# Altium PCB PCB1.PcbDoc
Units mil, origin at the board's own origin, x right, y up, seen from the top; angles counter-clockwise.
Board outline 984.25 x 1968.5 mil, 2 copper layers (Top Layer, Bottom Layer); 41 components, 26 nets, 123 pads, 58 vias.
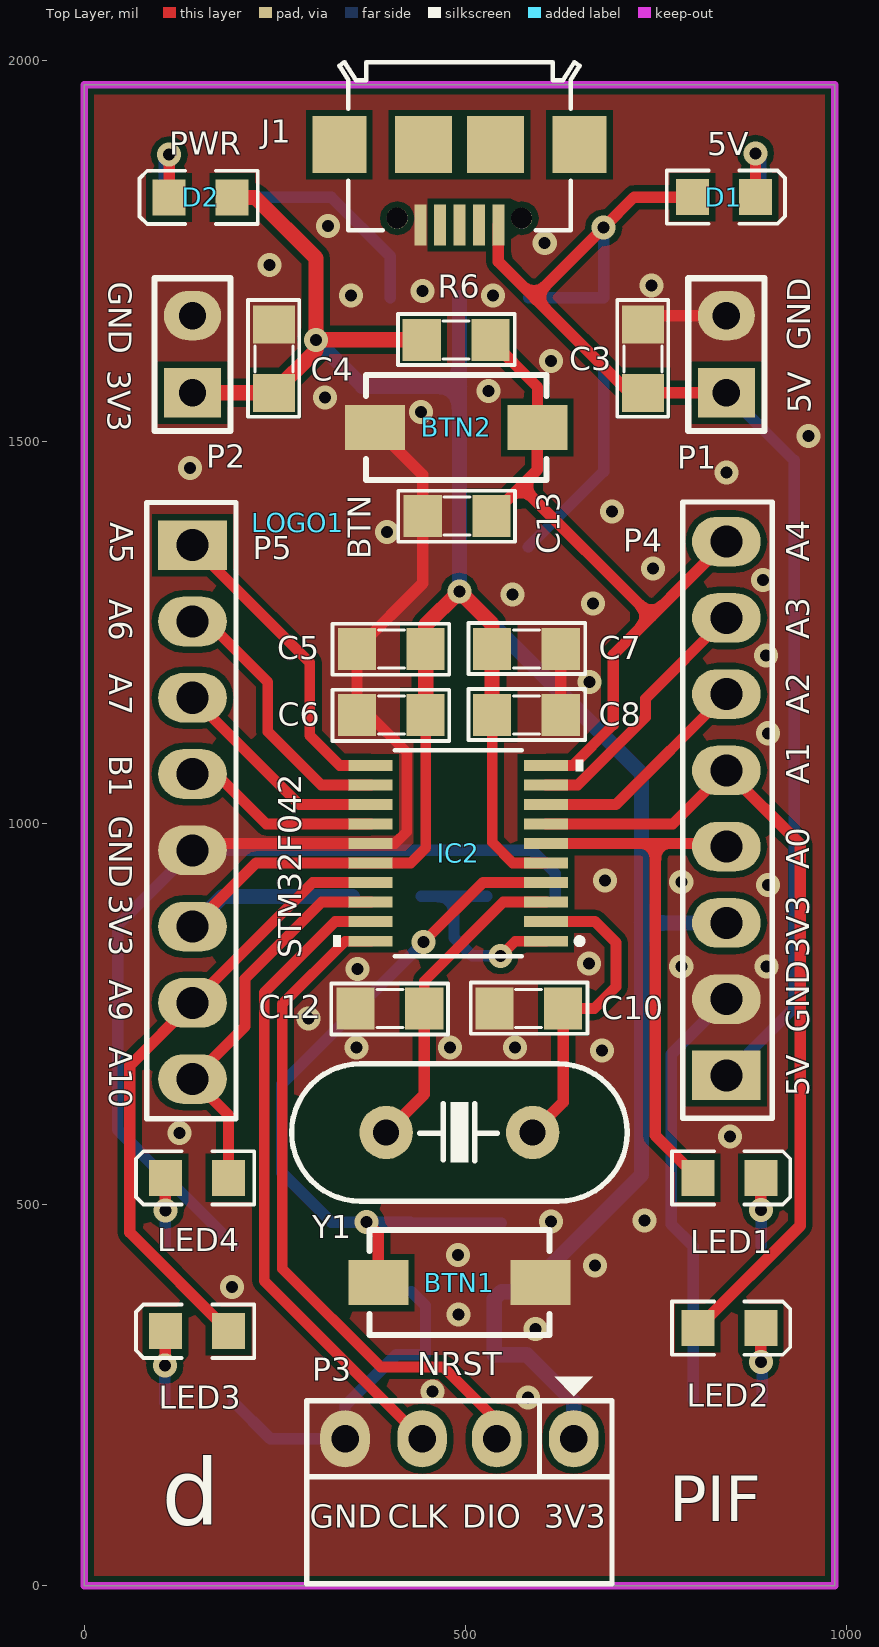
[diagram p0: Top Layer view]
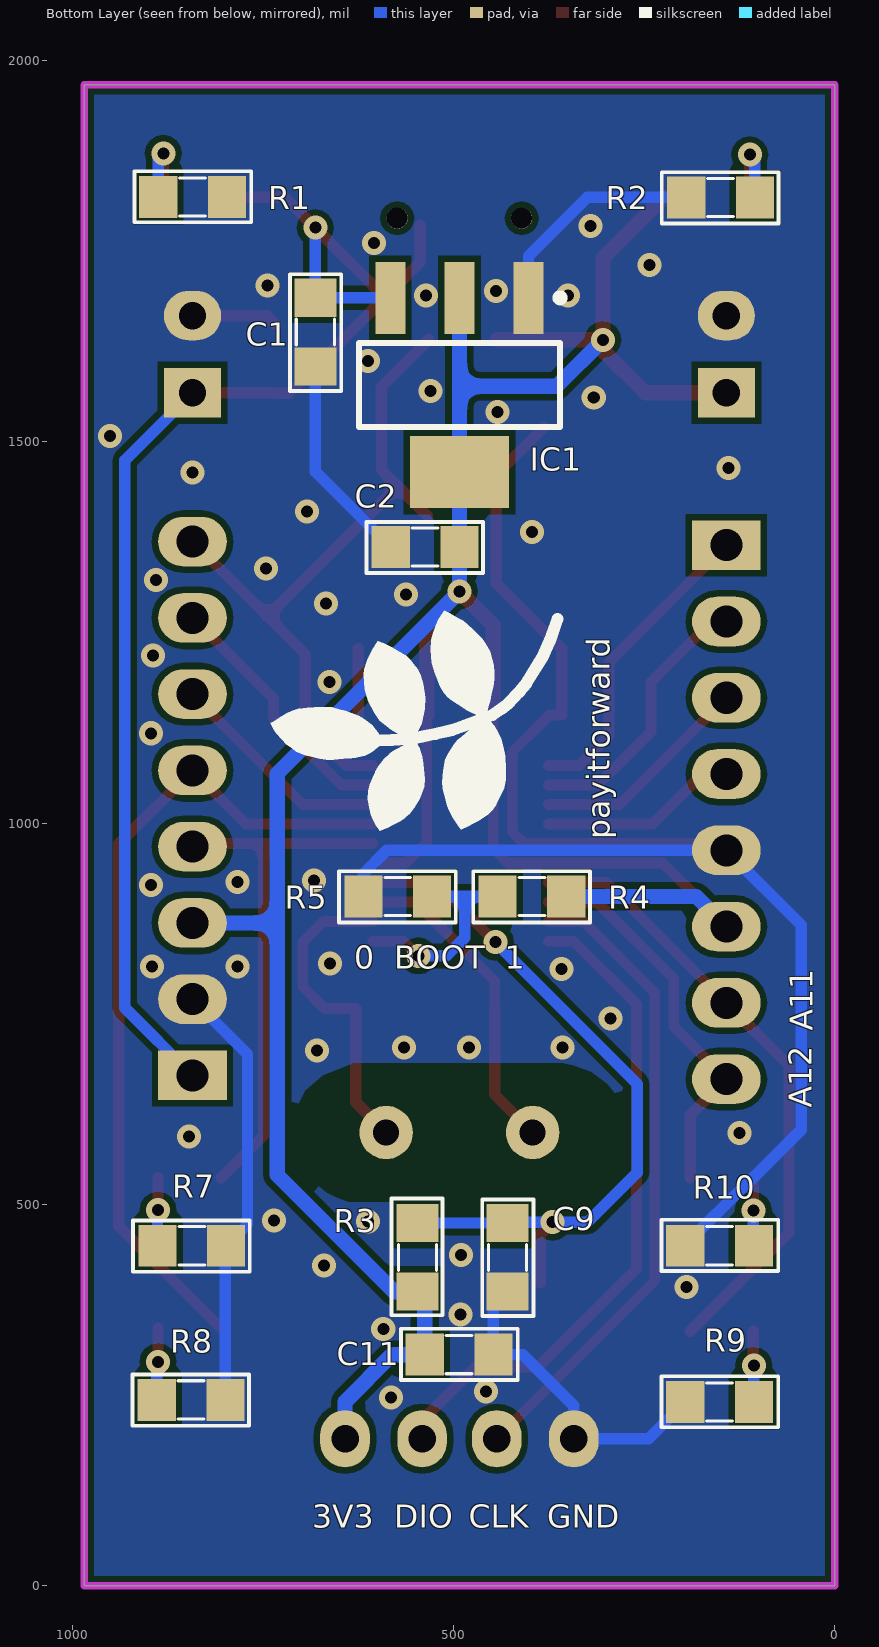
[diagram p1: Bottom Layer view, seen from below]
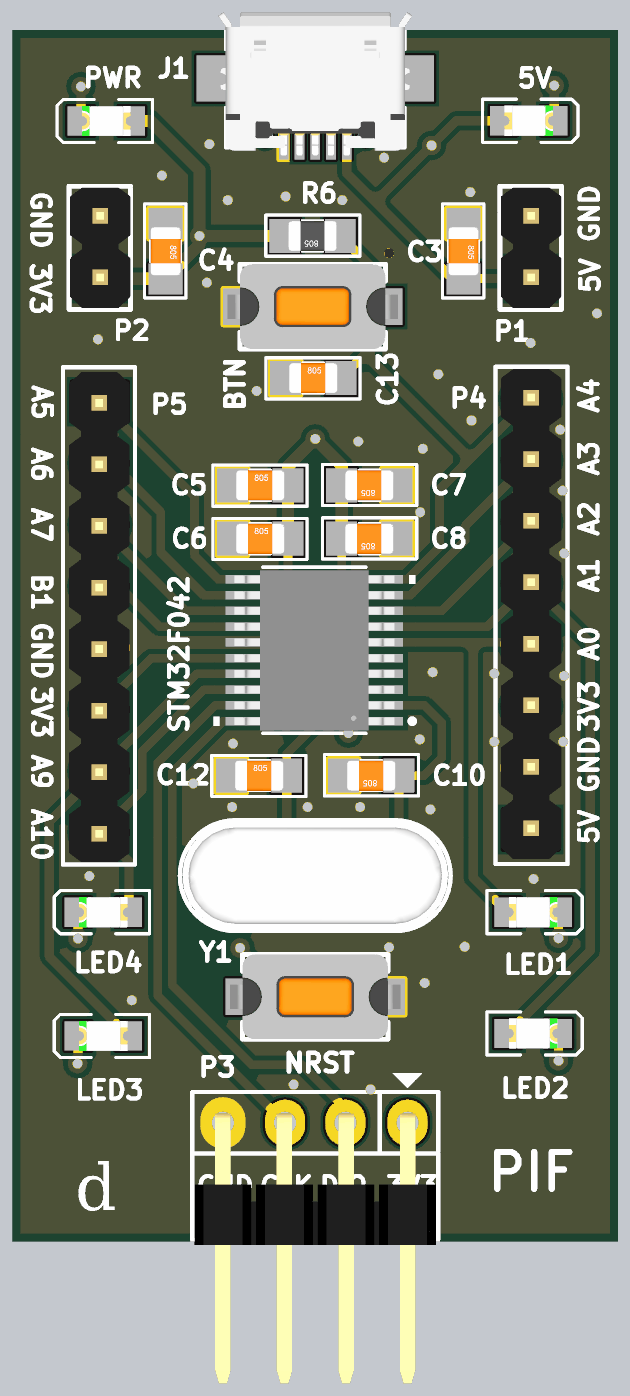
[diagram p2: 3D render of the assembled board from above, using the file's embedded part models]
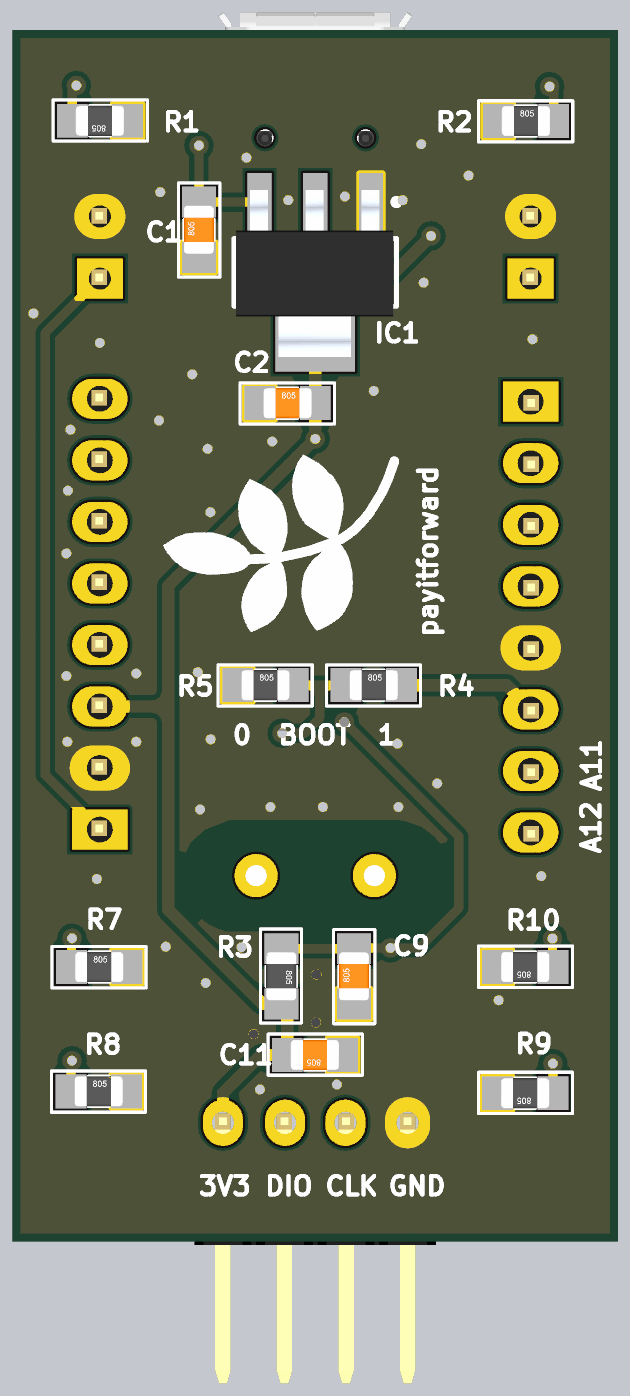
[diagram p3: 3D render of the assembled board from below, using the file's embedded part models]

## Layer stack, top to bottom
Top Solder: solder mask 0.4, Solder Resist, Dk 3.5
Top Layer: signal copper 1.4
Dielectric 1: dielectric 12.6, FR-4, Dk 4.8
Bottom Layer: signal copper 1.4
Bottom Solder: solder mask 0.4, Solder Resist, Dk 3.5

## Board outline
0,0 984.25,0 984.25,1968.5 0,1968.5

## Design rules (kind name [scope] priority, off if disabled: settings)
Clearance [All] p1: gap=8 ignorepadtopadclearanceinfootprint=FALSE
PlaneConnect [All] p1: planeconnectstyle=Direct reliefexpansion=20 reliefentries=4 reliefconductorwidth=10 reliefairgap=10
PolygonConnect [All] p1: connectstyle=Direct reliefconductorwidth=10 reliefentries=4 polygonreliefangle="90 Angle" airgapwidth=10
RoutingVias [All] p1: holewidth=15.75 width=31.5 viastyle="Through Hole" minholewidth=15.75 minwidth=31.5 maxholewidth=15.75 maxwidth=31.5
SolderMaskExpansion [All] p1: expansion=4
UnRoutedNet [All] p1: checkbadconnections=TRUE
UnpouredPolygon [All] p1: allowunpoured=TRUE allowshelved=TRUE
Width [All] p1: maxlimit=40 minlimit=10 preferedwidth=15 minimp=50.000000 maximp=50.000000 favimp=50.000000
27 further rules are at their usual default settings.

## Components (designator, comment, footprint, x,y, rotation, side; value= is the part's Value field where it differs from the comment)
BTN1 "Button" 434123050836 492.13,397.64 r180 top
BTN2 "Button" 434123050836 488,1519 r0 top
C1 "Cap Non-Pol SMD" CAP-SM-0805 681.1,1598.98 r90 bottom value=100nF
C2 "Cap Non-Pol SMD" CAP-SM-0805 582.13,1362.2 r180 bottom value=100nF
C3 "Cap Non-Pol SMD" CAP-SM-0805 733,1654 r270 top value=100nF
C4 "Cap Non-Pol SMD" CAP-SM-0805 249,1654 r270 top value=100nF
C5 "Cap Non-Pol SMD" CAP-SM-0805 357.83,1228.61 r0 top value=10uF
C6 "Cap Non-Pol SMD" CAP-SM-0805 357.83,1142 r0 top value=100nF
C7 "Cap Non-Pol SMD" CAP-SM-0805 625,1228.61 r180 top value=10uF
C8 "Cap Non-Pol SMD" CAP-SM-0805 625,1142 r180 top value=100nF
C9 "Cap Non-Pol SMD" CAP-SM-0805 429.13,385.83 r90 bottom value=100nF
C10 "Cap Non-Pol SMD" CAP-SM-0805 628,757 r180 top value=22pF
C11 "Cap Non-Pol SMD" CAP-SM-0805 447.63,303.15 r0 bottom value=100nF
C12 "Cap Non-Pol SMD" CAP-SM-0805 356,757 r0 top value=22pF
C13 "Cap Non-Pol SMD" CAP-SM-0805 444,1403 r0 top value=100nF
D1 "LED" LED_0805_Blue 839,1821 r0 top
D2 "LED" LED_0805_Blue 152.74,1820.59 r180 top
IC1 "AMS1117" SOT223 492.13,1574.8 r270 bottom value=LM317
IC2 "STM32F042F6P6" TSSOP20 490.69,960.63 r180 top
J1 "Micro USB 2.0 Type B Receptacle" 629105136821 492.13,1889.76 r180 top locked
LED1 "LED" LED_0805_Blue 846,535 r0 top
LED2 "LED" LED_0805_Blue 846,338 r0 top
LED3 "LED" LED_0805_Blue 148,334 r180 top
LED4 "LED" LED_0805_Blue 148,535 r180 top
LOGO1 "LOGO PIF" "PIF LOGO BOTTOM OVERLAY" 280,1394 r270 top
P1 "Header 2" JP2 842.13,1564.57 r90 top
P2 "Header 2" JP2 142.13,1564.57 r90 top
P3 "Header 4H" JP4H 642.13,192.91 r180 top locked
P4 "Header 8" JP8 842.13,669.29 r90 top
P5 "Header 8" JP8 142.13,1364.57 r270 top
R1 "Resistor 1/4W" RES-SM-0805 797,1821 r0 bottom value=470
R2 "Resistor 1/4W" RES-SM-0805 194.74,1820.59 r180 bottom value=470
R3 "Resistor 1/4W" RES-SM-0805 547.24,475.83 r270 bottom value=10K
R4 "Resistor 1/4W" RES-SM-0805 442,904 r180 bottom value=0
R5 "Resistor 1/4W" RES-SM-0805 618,904 r180 bottom value=0
R6 "Resistor 1/4W" RES-SM-0805 532.69,1633.86 r180 top value=10K
R7 "Resistor 1/4W" RES-SM-0805 888,446 r180 bottom value=470
R8 "Resistor 1/4W" RES-SM-0805 889,244 r180 bottom value=470
R9 "Resistor 1/4W" RES-SM-0805 106,241 r0 bottom value=470
R10 "Resistor 1/4W" RES-SM-0805 106,446 r0 bottom value=470
Y1 "8MHz" XTAL 492.13,594.49 r0 top locked

## Footprints (in the part's own frame and the unit in brackets; to place one, negate y for a bottom-side part, rotate by r counter-clockwise, add the part's x,y. Pads: shape width x height; smd on the part's side, far side on the other; paste and mask are expansions set on the pad)
434123050836 [mm] "SMD Tact Switch, body 6x3.5mm"
  rect 2x1.5 smd: 1(-2.7,0) 2(2.7,0)
  silkscreen extent -3,-1.75 3,1.75, body extent -3.65,-1.75 3.65,1.75, height 5
629105136821 [mm] "Micro USB 2.0 SMT Type B Horizontal 5 Contacts"
  rect 0.4x1.35 smd: 1(-1.3,2.675) 2(-0.65,2.675) 3(0,2.675) 4(0.65,2.675) 5(1.3,2.675)
  round 0.7 hole 0.7 unplated: MH1(-2.075,2.45) MH2(2.075,2.45)
  rect 1.8x1.9 smd: Shell(-4,0) Shell(4,0)
  rect 1.9x1.9 smd: Shell(-1.2,0) Shell(1.2,0)
  silkscreen extent -4,-2.75 4,2.85, body extent -4,-2.73 4,3.17, height 2.69
CAP-SM-0805 [mil]
  rect 50x55 smd: 1(0,0) 2(90,0)
  silkscreen extent -32,-34 121,33, body extent 6,-25 84,25, height 31
JP2 [mil]
  rect 65x75 hole 36: 1(0,0)
  oval 65x75 hole 36: 2(101,0)
  silkscreen extent -50,-50 150,50, body extent -48,-50 148,48, height 323
JP4H [mil]
  oval 65x75 hole 36: 1(0,0) 2(101,0) 3(199,0) 4(300,0)
  silkscreen extent -50,-81 350,190, body extent -46,-15 346,424, height 99
JP8 [mil] "JP8"
  rect 65x90 hole 42: 1(0,0)
  oval 65x90 hole 42: 2(100,0) 3(200,0) 4(300,0) 5(400,0) 6(500,0) 7(600,0) 8(700,0)
  silkscreen extent -56,-60 752,57, body extent -48,-50 748,48, height 323
LED_0805_Blue [mm] "Chip LED, 2-Leads, Body 2.0x1.3mm, IPC Medium Density"
  rect 1.1x1.2 smd: 1(-1.05,0) 2(1.05,0)
  silkscreen extent -1.91,-0.89 2.03,0.89, body extent -1,-0.63 1,0.62, height 0.68
"PIF LOGO BOTTOM OVERLAY" [mil]
RES-SM-0805 [mil]
  rect 50x55 smd: 1(0,0) 2(90,0)
  silkscreen extent -32,-34 121,33, body extent 6,-25 84,25, height 31
SOT223 [mm] "SOT223, 4-Leads, Body 6.5x3.5mm, Pitch 2.3mm, Lead Span 7mm, IPC Medium Density"
  rect 2.4x1 smd: 1(-2.9,2.3) 2(-2.9,0) 3(-2.9,-2.3)
  rect 2.4x3.3 smd: 4(2.9,0)
  silkscreen extent -3.02,-3.35 1.4,3.47, body extent -3.39,-3.27 3.5,3.23, height 1.72
TSSOP20 [mil]
  rect 58x14 smd paste+0 mask+0: 1(-115,115.16) 2(-115,89.57) 3(-115,63.98) 4(-115,38.39) 5(-115,12.8) 6(-115,-12.8) 7(-115,-38.39) 8(-115,-63.98) 9(-115,-89.57) 10(-115,-115.16) 11(115,-115.16) 12(115,-89.57) 13(115,-63.98) 14(115,-38.39) 15(115,-12.8) 16(115,12.8) 17(115,38.39) 18(115,63.98) 19(115,89.57) 20(115,115.16)
  silkscreen extent -164,-135 164,135, body extent -130,-130 130,130, height 47
XTAL [mil] "Footpin for Crystal 2 pin"
  round 70 hole 34: 1(-96.06,0) 2(96.06,0)
  silkscreen extent -220,-90 220,90, body extent -216,-88 216,88, height 142

## Part data
C1 C2 C3 C4 C5 C6 C7 C8 C9 C10 C11 C12 C13: "Capacitor"
IC1: "Available in 1.8V, 2.5V, 2.85V, 3.3V, 5V, and  Adjustable Versions"
IC2: "ARM® Cortex®-M0 STM32F0 Microcontroller IC 32-Bit 48MHz 32KB _32K x 8_ FLASH 20-TSSOP", Package="TSSOP-20 STMicroelectronics", Availability=Unavailable, MF=STMicroelectronics, MP=STM32F042F6P6, Price=None, SnapEDA_Link=https://www.snapeda.com/parts/STM32F042F6P6/STMicroelectronics/view-part/109253/?ref=snap
J1: library part 629105136821, "Micro USB 2.0 Type B, Receptacle, Horizontal, SMT", Manufacturer="Wurth Elektronik", Operating Temperature="-40 to +105degC", Rated Current=1A, Working Voltage=30VAC, Application="Micro USB 2.0", ComponentLink1Description=Manufacturer, ComponentLink1URL=http://www.we-online.de, ComponentLink2Description=Datasheet, ComponentLink2URL=https://katalog.we-online.com/em/datasheet/629105136821.pdf, Gender=Receptacle, Interface Type="Type B", Manufacturer Part Number=629105136821, Mounting Technology=SMT, Packaging="Tape and Reel", Pin Number=5, Published Date="August 2020", Type=Horizontal
P1 P2: "Header, 2-Pin", LatestRevisionDate=17-Jul-2002, LatestRevisionNote="Re-released for DXP Platform.", Publisher="Altium Limited"
P3: "Header, 4-Pin, Right Angle", LatestRevisionDate=17-Jul-2002, LatestRevisionNote="Re-released for DXP Platform.", Publisher="Altium Limited"
P4 P5: "Header, 8-Pin", LatestRevisionDate=17-Jul-2002, LatestRevisionNote="Re-released for DXP Platform.", Publisher="Altium Limited"
R1 R2 R3 R4 R5 R6 R7 R8 R9 R10: library part RES
Y1: library part XTAL, "Crystal For all Crystal 2pin"

## Via types
v1: diameter 31.5, hole 15.75, Top Layer to Bottom Layer, tented both sides, 58 vias

## Nets (pads, with @x,y where several pads share a name; then routed paths per layer and width w, separated by ;. In a path a pad name is that pad's centre, name@x,y a point inside that pad or via, vN(x,y) a via of type N, cw(c..) or ccw(c..) an arc to the next point about the centre after c; other vN are vias at no path point)
3.3V: C2.2 C4.2 C5.2 C6.2 C7.2 C8.2 C11.2 D2.1 IC1.2 IC1.4 IC2.5 IC2.16 P2.1 P3.1 P4.3 P5.6 R3.2 R4.2 R6.2 | length 4031.4
  Top Layer w14: P5.6 225.39,947.83 IC2.16 428.19,947.83 447.83,967.48 C6.2 ; C8.2 535,975 562.17,947.83 IC2.5
  Top Layer w20: P2.1 248.43,1564.57 304,1620.13 v1(304,1633.86) ; D2.1 224.41,1820.59 304,1741 v1(304,1633.86) ; R6.2 v1(304,1633.86) ; C6.2 C5.2 447.83,1259.83 v1(492.13,1304.13) 535,1261.25 C7.2 C8.2
  Bottom Layer w20: P5.6 181.56,904 R4.2 ; v1(304,1633.86) 364.86,1573 492.13,1573 ; IC1.2 492.13,1573 ; P3.1 642.13,241.29 580.26,303.15 C11.2 537.63,376.21 R3.2 577.83,385.83 731,539 731,869.29 ; P4.3 731,869.29 ; 492.13,1573 IC1.4 C2.2 v1(492.13,1304.13) 731,1065.25 731,869.29
5V: C1.2 C3.2 D1.1 IC1.3 J1.1 P1.1 P4.1 | length 1840.1
  Top Layer w15: J1.1 543.31,1736.22 589.87,1689.66 ; D1.1 721.2,1821 v1(681.1,1780.9) 589.87,1689.66 ; P1.1 733.57,1564.57 C3.2 715.53,1564 589.87,1689.66
  Bottom Layer w15: IC1.3 C1.2 v1(681.1,1780.9) ; P4.1 931,758.17 931,1475.69 P1.1
BOOT0: IC2.1 R4.1 R5.2 | length 278.7
  Top Layer w14: v1(546,826) 565.47,845.47 IC2.1
  Bottom Layer w15: R4.1 485,904 ; R5.2 485,904 ; v1(546,826) 509,826 485,850 485,904
GND: BTN1.1 BTN2.1 C1.1 C2.1 C3.1 C4.1 C5.1 C6.1 C7.1 C8.1 C9.1 C10.2 C11.1 C12.1 C13.1 IC1.1 IC2.15 J1.5 P1.2 P2.2 P3.4 P4.2 P5.5 R1.1 R2.1 R5.1 R7.2 R8.2 R9.2 R10.2 | length 3831.9
  Top Layer w14: P5.5 150.98,973.43 IC2.15 407.43,973.43 423,989 423,1093 374,1142 C6.1
  Top Layer w15: C6.1 C5.1 444,1314.78 C13.1 444,1456.7 BTN2.1 ; C8.1 C7.1 ; C3.1 744.57,1665.57 P1.2
  Bottom Layer w15: R2.1 324.41,1820.59 401.57,1743.43 IC1.1 ; R9.2 244.09,192.91 P3.4 342.13,236.13 409.15,303.15 C11.1 447.63,367.33 C9.1 ; R10.2 196,447.19 113.19,530 112,530 44,598 44,866.44 P5.5 587.43,964.57 618,934 R5.1 ; C2.1 681.1,1461.18 C1.1 ; R8.2 799,445 R7.2 770,474 770,697.17 P4.2
  other v1: 581.98,247 457,255 592,337 491,356 194.08,392 670,420 490.28,434 612,478 735,479 847,589 125,593.81 679.16,702 357,706 479.67,706 565,706 294,744.14 358.5,808.88 783,812 895,812 662,816 896.6,919 783,923 682.98,925 896.6,1118 662.55,1185 894,1220 667,1288 562,1299.94 890,1319 746,1334 397,1382 692,1409 842.13,1460 139,1466 950,1508 442,1539 316,1558 530,1566.53 612.22,1606 350,1692 536,1692 444,1698 744,1705 243,1732 604,1761 320,1783
NetD1_2: D1.2 R1.2 | length 117.4
  Top Layer w15: D1.2 v1(880.34,1878.34)
  Bottom Layer w15: v1(880.34,1878.34) 887,1871.68 R1.2
NetD2_2: D2.2 R2.2 | length 114.8
  Top Layer w15: D2.2 v1(111.4,1876.6)
  Bottom Layer w15: R2.2 104.74,1869.94 v1(111.4,1876.6)
NetLED1_2: LED1.2 R7.1 | length 89.3
  Top Layer w15: v1(887.34,492.66) LED1.2
  Bottom Layer w15: v1(887.34,492.66) 888,492 R7.1
NetLED2_2: LED2.2 R8.1 | length 94.7
  Top Layer w15: v1(887.34,293.66) LED2.2
  Bottom Layer w15: v1(887.34,293.66) 889,292 R8.1
NetLED3_2: LED3.2 R9.1 | length 93.3
  Top Layer w14: v1(106,289) v1@106.66,289.66
  Top Layer w15: v1@106.66,289.66 LED3.2
  Bottom Layer w15: R9.1 v1(106,289)
NetLED4_2: LED4.2 R10.1 | length 89.3
  Top Layer w15: v1(106.66,492.34) LED4.2
  Bottom Layer w15: R10.1 106.66,446.66 v1(106.66,492.34)
NRST: BTN1.2 C9.2 IC2.4 R3.1 | length 973.8
  Top Layer w14: v1(444.88,844) 523.13,922.24 IC2.4
  Top Layer w15: v1(370,477) 385.83,461.17 BTN1.2
  Bottom Layer w15: v1(444.88,844) 259,658.12 259,542 324,477 v1(370,477) 427.96,477 C9.2 R3.1
OSC_IN: C10.1 IC2.2 Y1.2 | length 421.5
  Top Layer w14: IC2.2 669.94,871.06 697.44,843.56 697.44,785.44 669,757 C10.1
  Top Layer w15: Y1.2 628,634.3 C10.1
OSC_OUT: C12.2 IC2.3 Y1.1 | length 421.8
  Top Layer w14: C12.2 446,793 549.65,896.65 IC2.3
  Top Layer w15: Y1.1 446,644.43 C12.2
PA0: IC2.6 LED1.1 P4.4 | length 699.6
  Top Layer w14: IC2.6 749,973.43 837.99,973.43 P4.4
  Top Layer w15: 749,973.43 749,590.66 LED1.1
PA1: IC2.7 LED2.1 P4.5 | length 1092.6
  Top Layer w14: IC2.7 771.85,999.02 P4.5
  Top Layer w15: LED2.1 939,472.34 939,972.42 P4.5
PA2: IC2.8 P4.6 | length 296.4
  Top Layer w14: IC2.8 697.44,1024.61 P4.6
PA3: IC2.9 P4.7 | length 341.3
  Top Layer w14: IC2.9 647.2,1050.2 736,1139 736,1163.17 P4.7
PA4: BTN2.2 C13.2 IC2.10 P4.8 R6.1 | length 935.2
  Top Layer w14: IC2.10 640.79,1075.79 694,1129
  Top Layer w15: R6.1 594.49,1572.06 594.49,1519.19 BTN2.2 594.3,1463.3 573,1442 ; C13.2 573,1442 ; 694,1129 694,1221.17 P4.8 ; 743.92,1271.08 573,1442
PA5: IC2.11 P5.1 | length 409.2
  Top Layer w14: P5.1 296,1210.69 296,1115 335.21,1075.79 IC2.11
PA6: IC2.12 P5.2 | length 360.4
  Top Layer w14: P5.2 161.43,1264.57 241,1185 241,1120 310.8,1050.2 IC2.12
PA7: IC2.13 P5.3 | length 291.5
  Top Layer w14: P5.3 282.09,1024.61 IC2.13
PA9/PA11: IC2.17 LED3.1 P5.7 | length 817
  Top Layer w14: P5.7 299.8,922.24 IC2.17
  Top Layer w15: P5.7 60,682.44 60,463.34 LED3.1
PA10/PA12: IC2.18 LED4.1 P5.8 | length 515.5
  Top Layer w14: P5.8 211,733.44 211,796 311.65,896.65 IC2.18
  Top Layer w15: P5.8 189.34,617.35 LED4.1
PB1: IC2.14 P5.4 | length 260.7
  Top Layer w14: P5.4 173.43,1064.57 238.98,999.02 IC2.14
SWCLK: IC2.20 P3.2 | length 884.4
  Top Layer w14: IC2.20 342.47,845.47 260,763 260,416 389,287 471,287 541.13,216.87 P3.2
SWDIO: IC2.19 P3.3 | length 849.1
  Top Layer w14: IC2.19 329.18,871.06 236,777.89 236,400.04 P3.3
pads on no net: J1.2 J1.3 J1.4 J1.MH1 J1.MH2 J1.Shell

## Polygon pours and split planes (outlines as drawn)
GND on Bottom Layer (solid, remove dead copper, pour order 14): 1,1968.5 984,1968.5 984,0 0,0
GND on Bottom Layer "Bottom Layer-GND 1" (solid, remove dead copper, pour order 4): 1,1968.5
GND on Top Layer (solid, remove dead copper, pour order 16): 0,1968.5 984.25,1968.5 984.25,1968 984.25,0 0,0

## Keep-outs
Keep-Out Layer:
  the board outline again, w10

## Other copper
Top Layer:
  pour cut-out: 300.23,658.58 320.91,674.29 345,682.44 357,685 632,685 672,669.29 695,649 703.5,632.5 712,616 712,578.25 702,552 696.5,542.5 688.5,534.5 668,516 654.5,509.5 639,504 345.45,504 320.91,514 305,525 286,544 275,573 273,596 279,627 285,641
Bottom Layer:
  pour cut-out: 299.23,658.58 319.91,674.29 344,682.44 356,685 631,685 671,669.29 694,649 702.5,632.5 711,616 711,578.25 701,552 695.5,542.5 687.5,534.5 667,516 653.5,509.5 638,504 344.45,504 319.91,514 304,525 285,544 274,573 272,596 278,627 284,641

## Silkscreen, mask and mechanical layers (free items; w line width, h text height)
Top Overlay:
  text "PWR" at 111.4,1876.6 h30
  text "5V" at 817,1876 h30
  text "GND" at 32,1710 h30 r270
  text "GND" at 952,1620 h30 r90
  text "3V3" at 31,1594 h30 r270
  text "5V" at 953,1537.83 h30 r90
  text "A5" at 34,1395 h30 r270
  text "BTN" at 376,1346 h30 r90
  text "A4" at 951,1343 h30 r90
  text "A6" at 33,1294 h30 r270
  text "A3" at 951,1241 h30 r90
  text "A7" at 33,1196 h30 r270
  text "A2" at 951,1143 h30 r90
  text "B1" at 33,1089 h30 r270
  text "A1" at 951,1051 h30 r90
  text "GND" at 33,1010 h30 r270
  text "A0" at 951,940 h30 r90
  text "3V3" at 33,906 h30 r270
  text "3V3" at 951,824 h30 r90
  text "STM32F042" at 285,823 h30 r90
  text "A9" at 33,795 h30 r270
  text "GND" at 951,725 h30 r90
  text "A10" at 33,707 h30 r270
  text "5V" at 951,641.83 h30 r90
  text "NRST" at 437,276 h30
  text "PIF" at 767,85 h60
  text "GND" at 295.6,76 h30
  text "CLK" at 398.26,76 h30
  text "DIO" at 495.93,76 h30
  text "3V3" at 603.6,76 h30
  text "d" at 102,51 h150
Bottom Overlay:
  text "0  BOOT  1" at 630,809 h30
  text "A11" at 29,728 h30 r270
  text "A12" at 30,627 h30 r270
  text "GND" at 377,76 h30
  text "CLK" at 479.67,76 h30
  text "DIO" at 577.33,76 h30
  text "3V3" at 685,76 h30

## Text inside footprints (layer, text, board x,y; h text height)
IC2: Mechanical 13 "*" at 576.19,883.63 h30 r180
J1: Mechanical 2 "PCB Edge" at 539.37,1972.44 h30 r180
LOGO1: Bottom Overlay "payitforward" at 295,979 h30 r270